# Allegro board BBear_speed_sensor.brd
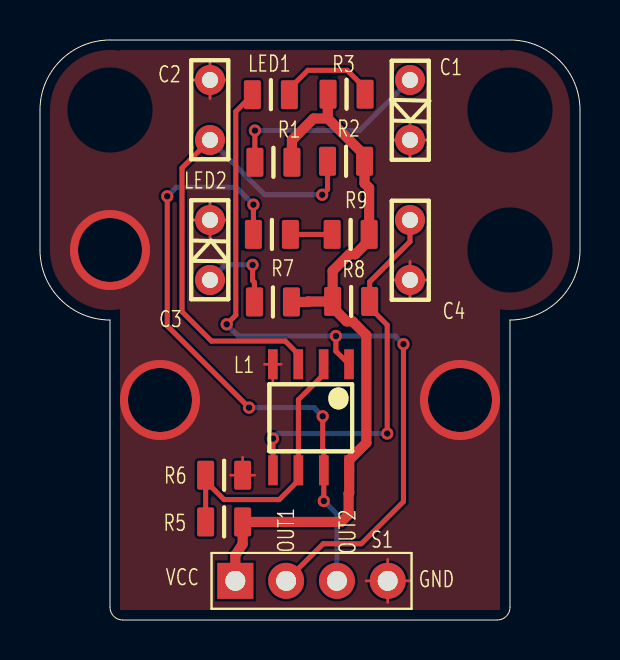
[diagram p0: board, top side]
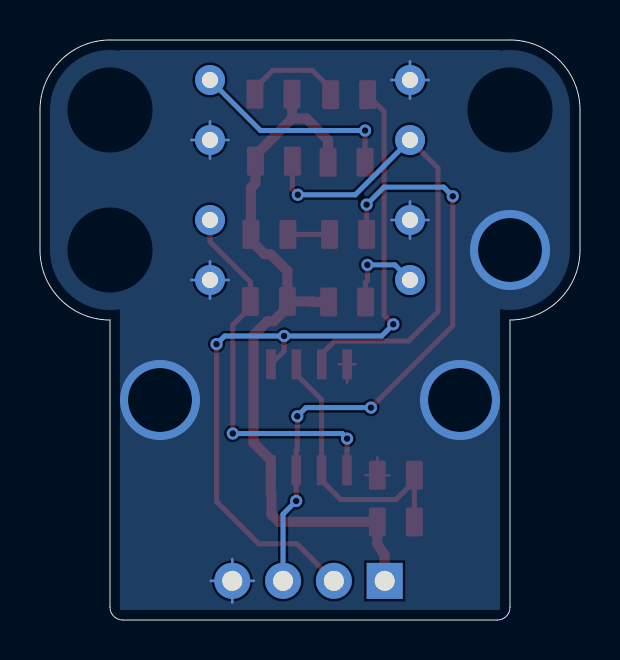
[diagram p1: board, bottom side, seen from below]

Outline 27 x 29 mm; copper layers: TOP, BOTTOM. Coordinates in mm from the lower left corner of the outline.
Outline path: 0,25.5 0,18.5 arc(1.03,16.03) 3.5,15 3.5,0.63 arc(3.69,0.19) 4.13,0 22.87,0 arc(23.31,0.19) 23.5,0.63 23.5,15 arc(25.97,16.03) 27,18.5 27,25.5 arc(25.97,27.97) 23.5,29 3.5,29 arc(1.03,27.97) 0,25.5

## Placement (name value [footprint] x y rotation side)
C1  CON2_T  [CON2_3MM]  18.5 25.5 180 top
C2  CON2_R  [CON2_3MM]  8.5 25.5 0 top
C3  CON2_T  [CON2_3MM]  8.5 18.5 0 top
C4  CON2_R  [CON2_3MM]  18.5 18.5 180 top
L1  LM393  [SO8]  13.55 10.14 0 top
LED1  LED_0805  [C-0805]  11.54 26.27 0 top
LED2  LED_0805  [C-0805]  11.6 19.28 0 top
R1  330  [C-0805]  11.67 22.89 180 top
R2  10K  [C-0805]  15.3 22.94 180 top
R3  1K  [C-0805]  15.33 26.29 0 top
R5  10K  [C-0805]  9.21 4.9 180 top
R6  10K  [C-0805]  9.21 7.24 0 top
R7  330  [C-0805]  11.65 15.9 180 top
R8  10K  [C-0805]  15.56 15.93 0 top
R9  1K  [C-0805]  15.53 19.28 180 top
S1  -  [CON4]  9.77 1.96 90 top

## Library data of the parts
C1-C4 = CON2
L1 = SO8
LED1 LED2 = LED: Tolerance: RichardLC; User Part Number: pn
R1-R3 R5-R9 = R: Tolerance: RichardLC; User Part Number: pn
S1 = CON4

## Footprints (pads in the part's own frame, mm; a bottom-side part is the same pattern mirrored in y, then rotated)
C-0805
  custom 0.848x1.448 smd: 1(-0.925,0) 2(0.925,0)
CON2_3MM
  round 1.5 hole 0.8: 1(0,1.5) 2(0,-1.5)
CON4
  rect 1.8x1.8 hole 1: 1(0,0)
  round 1.8 hole 1: 2(0,-2.54) 3(0,-5.08) 4(0,-7.62)
SO8
  rect 0.48x1.5 smd: 1(1.9,2.65) 2(0.63,2.65) 3(-0.64,2.65) 4(-1.91,2.65) 5(-1.9,-2.65) 6(-0.63,-2.65) 7(0.64,-2.65) 8(1.91,-2.65)

## Nets
GND: C1.1(-) C2.1(-) C3.1(-) C4.1(-) L1.4(GND) R6.2 S1.4
VCC: L1.8(VCC) R1.1 R2.1 R3.1 R5.1 R7.1 R8.1 R9.1 S1.1
IN-: L1.2(IN1-) L1.6(IN2-) R5.2 R6.1
OUT2: L1.7(OUT2) LED2.1 S1.3
N00480: L1.1(OUT1) LED1.1 S1.2
N00568: C1.2(+) R1.2
N00572: C2.2(+) L1.3(IN1+) R2.2
N00579: C3.2(+) R7.2
N00583: C4.2(+) L1.5(IN2+) R8.2
N00676: LED1.2 R3.2
N00683: LED2.2 R9.2

## Via types
v1: diameter 0.61, hole 0.33, TOP to BOTTOM, 13 vias
v2: diameter 4, hole 3.2, TOP to BOTTOM, 3 vias

## Routing (per net, layer and track width the routed paths; a pad name or vN(x,y) marks a point on that pad's centre or on a via; arc(x,y) is an arc through that point)
GND: length 42.2
  TOP w0.127: 9.53,7.24 R6.2 ; R6.2 10.13,8.14 ; R6.2 10.73,7.24 ; 17.57,17 C4.1 ; C4.1 18.5,16.07 ; C4.1 18.5,17.93 ; C4.1 19.43,17 ; S1.4 17.39,3.04 ; S1.4 16.31,1.96 ; S1.4 18.46,1.96 ; S1.4 17.39,0.88 ; 7.57,27 C2.1 ; C2.1 8.5,27.93 ; C2.1 9.43,27 ; C2.1 8.5,26.07 ; 17.57,24 C1.1 ; C1.1 18.5,23.07 ; C1.1 19.43,24 ; C1.1 18.5,24.93 ; 11.64,11.86 L1.4 ; L1.4 11.22,12.79 ; L1.4 12.06,12.79 ; C3.1 9.43,20 ; C3.1 8.5,20.93 ; C3.1 7.57,20 ; C3.1 8.5,19.07
  BOTTOM w0.127: 16.31,1.96 S1.4 ; S1.4 17.39,3.04 ; S1.4 17.39,0.88 ; S1.4 18.46,1.96 ; C3.1 9.43,20 ; C3.1 7.57,20 ; C3.1 8.5,20.93 ; C3.1 8.5,19.07 ; 8.5,26.07 C2.1 ; C2.1 9.43,27 ; C2.1 7.57,27 ; C2.1 8.5,27.93 ; C1.1 18.5,24.93 ; C1.1 19.43,24 ; C1.1 17.57,24 ; C1.1 18.5,23.07 ; 18.5,16.07 C4.1 ; C4.1 19.43,17 ; C4.1 18.5,17.93 ; C4.1 17.57,17
  vias: v2(3.5,18.5) v2(6,11) v2(21,11)
VCC: length 38
  TOP w0.508: S1.1 9.77,3.24 10.13,3.8 R5.1 15.05,4.9 15.43,5.29 15.43,6.33 15.46,6.36 L1.8 15.46,8 16.32,8.86 16.32,14.24 15.63,14.93 15.33,14.93 14.63,15.63 R8.1 ; R1.1 12.6,23.99 13.68,25.08 14.39,25.08 ; 14.39,25.08 16.23,23.24 R2.1 16.23,21.83 16.46,21.6 R9.1 16.46,18.98 15.76,18.29 15.46,18.29 14.63,17.46 R8.1 ; 14.39,25.08 14.39,26.28 R3.1 ; R8.1 13.4,15.93 13.38,15.9 R7.1
IN-: length 14.1
  TOP w0.254: 8.28,6.94 9.2,6.02 11.97,6.02 12.92,6.98 L1.6 12.92,11.02 14.18,12.28 L1.2 ; 8.28,6.94 R5.2 ; 8.28,6.94 R6.1
OUT2: length 31
  TOP w0.254: LED2.1 v1(10.67,20.77) ; v1(6.36,21.19) 6.36,14.71 v1(10.45,10.62) ; v1(14.13,10.19) 14.13,8.55 14.19,8.49 L1.7 v1(14.19,5.95)
  BOTTOM w0.254: v1(6.36,21.19) 6.82,21.64 9.8,21.64 v1(10.67,20.77) ; v1(14.13,10.19) 13.7,10.62 v1(10.45,10.62) ; v1(14.19,5.95) 14.85,5.29 S1.3
N00480: length 38.3
  TOP w0.254: L1.1 14.8,13.44 v1(14.8,14.2) ; S1.2 14.16,3.81 16.07,3.81 18.17,5.92 v1(18.17,13.79) ; v1(9.33,14.78) 9.79,15.24 9.79,25.43 10.62,26.25 LED1.1
  BOTTOM w0.254: v1(18.17,13.79) 17.77,14.2 v1(14.8,14.2) 9.92,14.2 v1(9.33,14.78)
N00568: length 10.4
  TOP w0.254: R1.2 v1(10.75,24.47)
  BOTTOM w0.254: C1.2 15.97,24.47 v1(10.75,24.47)
N00572: length 24.9
  TOP w0.254: v1(14.11,21.26) 14.38,21.53 R2.2 ; C2.2 7.1,22.6 7.1,15.42 8.57,13.95 12.26,13.95 12.91,13.3 L1.3
  BOTTOM w0.254: v1(14.11,21.26) 11.24,21.26 C2.2
N00579: length 4.3
  TOP w0.254: R7.2 10.72,16.88 10.63,16.97 v1(10.63,17.76)
  BOTTOM w0.254: C3.2 9.26,17.76 v1(10.63,17.76)
N00583: length 19.3
  TOP w0.254: v1(11.65,9.07) 11.65,8.5 11.65,8.49 L1.5 ; v1(17.36,9.32) 17.36,14.75 16.48,15.63 R8.2 16.48,16.91 18.5,18.92 C4.2
  BOTTOM w0.254: v1(17.36,9.32) 11.9,9.32 v1(11.65,9.07)
N00676: length 5.1
  TOP w0.254: LED1.2 12.47,26.57 13.39,27.48 15.36,27.48 16.25,26.59 R3.2
N00683: length 2.1
  TOP w0.254: R9.2 LED2.2

## Copper pours and planes (outline as drawn; the poured copper is in the pictures)
GND on TOP: 4,0.5 4,15.5 4,15.54 3.76,15.51 3.52,15.5 3.5,15.5 1.38,16.38 0.5,18.5 0.5,25.5 1.38,27.62 3.5,28.5 3.52,28.5 3.76,28.49 4,28.46 4,28.5 23,28.5 23,28.46 23.24,28.49 23.48,28.5 23.5,28.5 25.62,27.62 26.5,25.5 26.5,18.5 25.62,16.38 23.5,15.5 23.48,15.5 23.24,15.51 23,15.54 23,0.5 ; 1 cut-out
GND on BOTTOM: 4,0.5 4,15.5 4,15.54 3.76,15.51 3.52,15.5 3.5,15.5 1.38,16.38 0.5,18.5 0.5,25.5 1.38,27.62 3.5,28.5 3.52,28.5 3.76,28.49 4,28.46 4,28.5 23,28.5 23,28.46 23.24,28.49 23.48,28.5 23.5,28.5 25.62,27.62 26.5,25.5 26.5,18.5 25.62,16.38 23.5,15.5 23.48,15.5 23.24,15.51 23,15.54 23,0.5

## Text on the board
Ref Des/Silkscreen Top: VCC | GND | OUT1 | OUT2
COMPVAL_TYPE_TOP: FIGURE | SIZE | 0.3302 | 0.8 | 1.0 | 3.2 | DRILL CHART: TOP to BOTTOM | ALL UNITS ARE IN MILLIMETERS | PLATED | QTY | 13 | 8 | 4 | 6
